# EAGLE board PCB_BIT_POWER_RV01 (EAGLE 6.3)
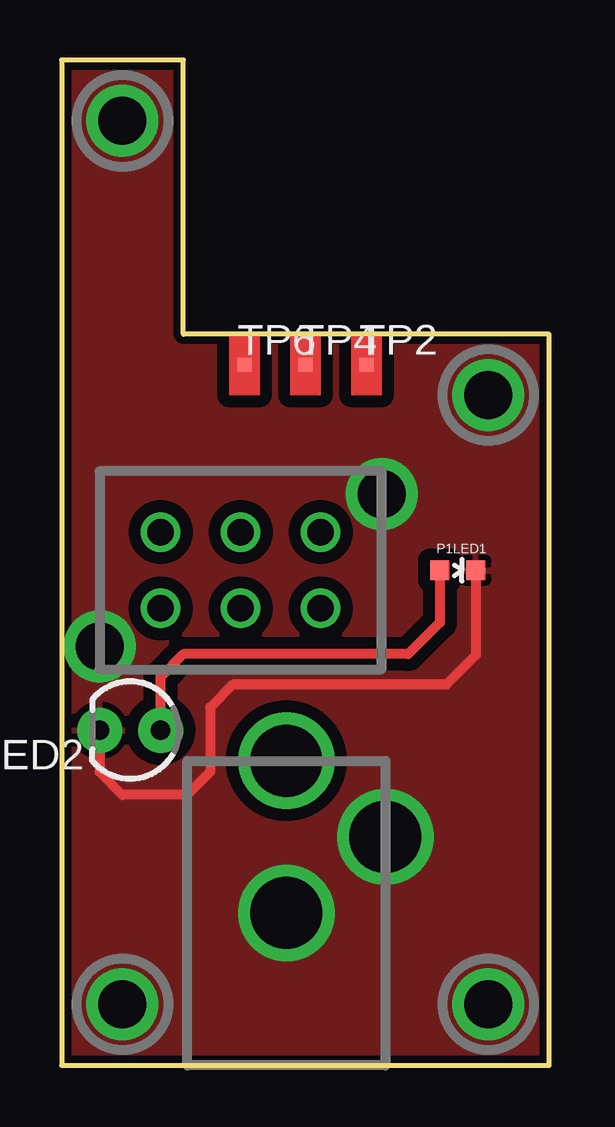
[diagram p0: board, top side]
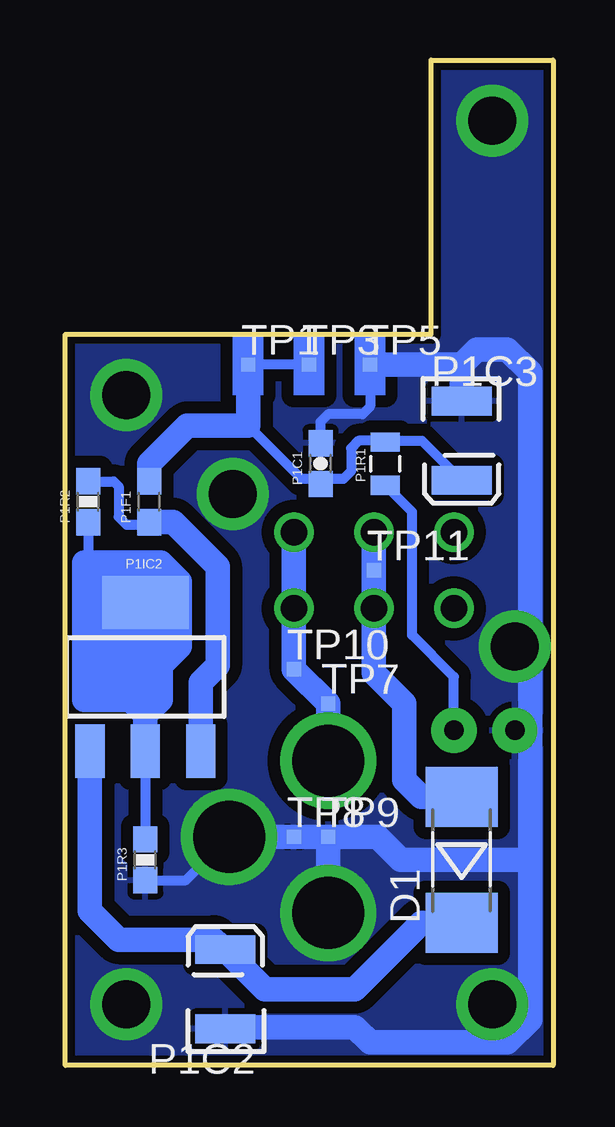
[diagram p1: board, bottom side, seen from below]

Size 20.32 x 41.91 mm. Coordinates in mm from the lower left corner, seen from the top.
Outline: 20.32,0 20.32,30.48 5.08,30.48 5.08,41.91 0,41.91 0,0 20.32,0
Copper layers (1*16): Top 0.035mm / dielectric 1.5mm / Bottom 0.035mm
Design rules "default *": minimum track width 10mil, minimum drill 24mil, track to track 20mil, track to pad 20mil, pad to pad 20mil, via to via 20mil, smd to smd 8mil, copper to edge 1mil, drill to drill 8mil, minimum pad ring 10mil, minimum via ring 8mil, stop-mask expansion 4mil, vias tented up to drill 0mil, thermal gap 10mil

## Footprints (pad centres in the part's own frame; a part is rotated, then mirrored left to right if it is on the bottom)
MELF-MLL41 = smd 2.5 x 3: A 2.625,0; C -2.625,0
0603-CAP = smd 1.1 x 1: 1 -0.85,0; 2 0.85,0
EIA3528 = smd 1.2 x 2.5: A 1.65,0; C -1.65,0
0603 = smd 1.1 x 1: 1 -0.85,0; 2 0.85,0
SOT223 = smd 1.219 x 2.235: 1 -2.311,-3.099; 2 0,-3.099; 3 2.311,-3.099 | smd 3.6 x 2.2: 4 0,3.099
LED-0603 = smd 0.8 x 0.8: A 0,-0.75; C 0,0.75
LED3MM = drill 0.813 pad 1.88: A -1.27,0; K 1.27,0
0805 = smd 0.8 x 1.2: 1 -0.9,0; 2 0.9,0
0603-RES = smd 1.1 x 1: 1 -0.85,0; 2 0.85,0
TP06SQ = smd 0.6 x 0.6: TP 0,0

## Placement (x,y rotation side)
D1  [MELF-MLL41]  3.81,8.57 90 bottom
P1C1  0.1uF  [0603-CAP]  9.68,25.08 90 bottom
P1C2  10uF/20V  [EIA3528]  13.65,3.17 90 bottom
P1C3  10uF  [EIA3528]  3.81,26.04 270 bottom
P1F1  500mA PTC  [0603]  16.83,23.5 90 bottom
P1IC2  [SOT223]  16.99,16.19 0 bottom
P1LED1  RED  [LED-0603]  16.51,20.64 270 top
P1LED2  RED  [LED3MM]  2.86,13.97 180 top
P1R1  330  [0805]  6.99,25.08 90 bottom
P1R2  240  [0603-RES]  19.37,23.5 90 bottom
P1R3  720  [0603-RES]  16.99,8.57 90 bottom
TP1  TPSQTP06SQ  [TP06SQ]  12.7,29.21 0 bottom
TP2  TPSQTP06SQ  [TP06SQ]  12.7,29.21 0 top
TP3  TPSQTP06SQ  [TP06SQ]  10.16,29.21 0 bottom
TP4  TPSQTP06SQ  [TP06SQ]  10.16,29.21 0 top
TP5  TPSQTP06SQ  [TP06SQ]  7.62,29.21 0 bottom
TP6  TPSQTP06SQ  [TP06SQ]  7.62,29.21 0 top
TP7  TPSQTP06SQ  [TP06SQ]  9.37,15.08 0 bottom
TP8  TPSQTP06SQ  [TP06SQ]  10.79,9.53 0 bottom
TP9  TPSQTP06SQ  [TP06SQ]  9.37,9.53 0 bottom
TP10  TPSQTP06SQ  [TP06SQ]  10.79,16.51 0 bottom
TP11  TPSQTP06SQ  [TP06SQ]  7.46,20.64 0 bottom

## Library data of the parts
D1 = diode
P1C1-P1C3 P1F1 P1IC2 P1LED1 P1LED2 P1R1-P1R3 = SparkFun
TP1-TP11 = testpad

## Nets
GND: P1C1.2 P1C2.C P1C3.C P1LED1.C P1LED2.K P1R3.1 TP5.TP TP8.TP TP9.TP
N$1: TP7.TP TP10.TP
N$2: P1F1.1 P1IC2.3 P1R2.2
N$3: P1IC2.2 P1IC2.4 P1R2.1 P1R3.2
N$4: D1.A TP11.TP
N$5: D1.C P1C2.A P1IC2.1
N$6: P1LED1.A P1LED2.A P1R1.1
VCC: P1C1.1 P1C3.A P1F1.2 P1R1.2 TP1.TP TP3.TP

## Tracks (layer width: path | path; a pad name or v marks a point on that pad's centre or on a via)
GND  (via drill 2, 2 pad 1.02, 3 pad 1.02)
  Top 0.406: P1LED1.C 17.26,17.1 16.03,15.88 7.14,15.88 6.19,14.92 6.19,12.22 5.24,11.27 2.54,11.27 1.59,12.22 P1LED2.K
  Bottom 0.406: TP5.TP 7.62,27.46 7.94,27.15 9.37,27.15 9.68,26.83 P1C1.2 | P1C2.C 13.59,1.59 | P1R3.1 15.3,7.72 v13.49,9.53
  Bottom 1.016: 0.95,8.57 6.35,8.57 7.3,9.53 TP9.TP | 0.95,8.57 0.95,13.97 | v9.37,6.35 TP9.TP | TP9.TP TP8.TP v13.49,9.53 | 0.95,8.57 0.95,1.91 1.91,0.95 7.62,0.95 8.26,1.59 13.59,1.59 | 0.95,13.97 0.95,17.46 | 0.95,17.46 0.95,28.89 1.91,29.84 3.17,29.84 3.81,29.21 | P1LED2.K 0.95,13.97 | v1.59,17.46 0.95,17.46 | P1C3.C 3.81,29.21 | 3.81,29.21 TP5.TP
  other vias: 2.54,2.54 17.78,2.54 17.78,27.94 2.54,39.37 13.34,23.81
  pour Top (isolate 0.305): 0,41.91 20.32,41.91 20.32,0 0,0
  pour Bottom (isolate 0.305): 0,41.91 20.32,41.91 20.32,0 0,0
N$1  (via drill 1.1 pad 1.02, 3 pad 1.02)
  Bottom 1.016: v9.37,12.7 TP7.TP TP10.TP v10.79,19.05 v10.79,22.23
N$2
  Bottom 0.406: P1R2.2 18.31,24.34 18.1,24.13 18.1,22.86 17.78,22.54 16.93,22.54 P1F1.1
  Bottom 1.016: P1IC2.3 14.68,15.96 13.97,16.67 13.97,20.8 15.82,22.64 P1F1.1
N$3
  Bottom 0.406: P1IC2.2 P1R3.2 | P1R2.1 19.37,19.68 18.97,19.29 17.62,19.29 P1IC2.4
  Bottom 1.016: P1IC2.2 16.99,14.61 | 16.99,14.61 17.62,15.24 19.53,15.24 19.53,20.95 16.35,20.95 15.56,20.16 15.56,17.46 16.35,16.67 16.35,15.24 16.99,14.61 | 16.99,14.61 16.99,17.14 16.03,18.1 16.03,19.53 16.83,20.32 18.57,20.32 18.73,20.16 18.73,15.88 17.78,15.88 17.78,17.62 17.14,18.26 18.1,18.26 18.1,18.82 17.62,19.29
N$4  (via drill 1.1 pad 1.02)
  Bottom 1.016: D1.A 5.48,11.2 6.19,11.91 6.19,15.08 7.46,16.35 v7.46,19.05 TP11.TP v7.46,22.23
N$5
  Bottom 1.016: D1.C 5.48,5.95 8.26,3.17 12,3.17 P1C2.A 14.13,5.24 18.1,5.24 19.3,6.44 P1IC2.1
N$6
  Top 0.406: P1LED1.A 15.76,18.46 14.45,17.14 5.08,17.14 4.13,16.19 P1LED2.A
  Bottom 0.406: P1LED2.A 4.13,16.19 5.87,17.94 5.87,23.07 P1R1.1
N$7  (via drill 1.1 pad 1.02)
  other vias: 4.13,19.05
N$12  (via drill 1.1 pad 1.02)
  other vias: 4.13,22.23
VCC
  Bottom 0.406: 6.99,26.04 5.46,26.04 P1C3.A | 12.7,26.67 10.48,24.45 9.53,24.45 | P1R1.2 6.99,26.04 | P1C1.1 9.53,24.45 | 6.99,26.04 8.1,26.04 8.41,25.72 8.41,24.77 8.73,24.45 9.53,24.45 | TP3.TP TP1.TP
  Bottom 1.016: P1F1.2 16.83,25.08 15.24,26.67 12.7,26.67 TP1.TP
(copper drawn outside any net)
  shapes: Bottom area x3, Top area x3

## Text on the board
Top: TOP
Bottom: BOTTOM